# Altium PCB ESP32PCB.PcbDoc
Units mm, origin at the board's own origin, x right, y up, seen from the top; angles counter-clockwise.
Board outline 35.6 x 51 mm, 2 copper layers (Top Layer, Bottom Layer); 8 components, 9 nets, 32 pads, 4 vias.
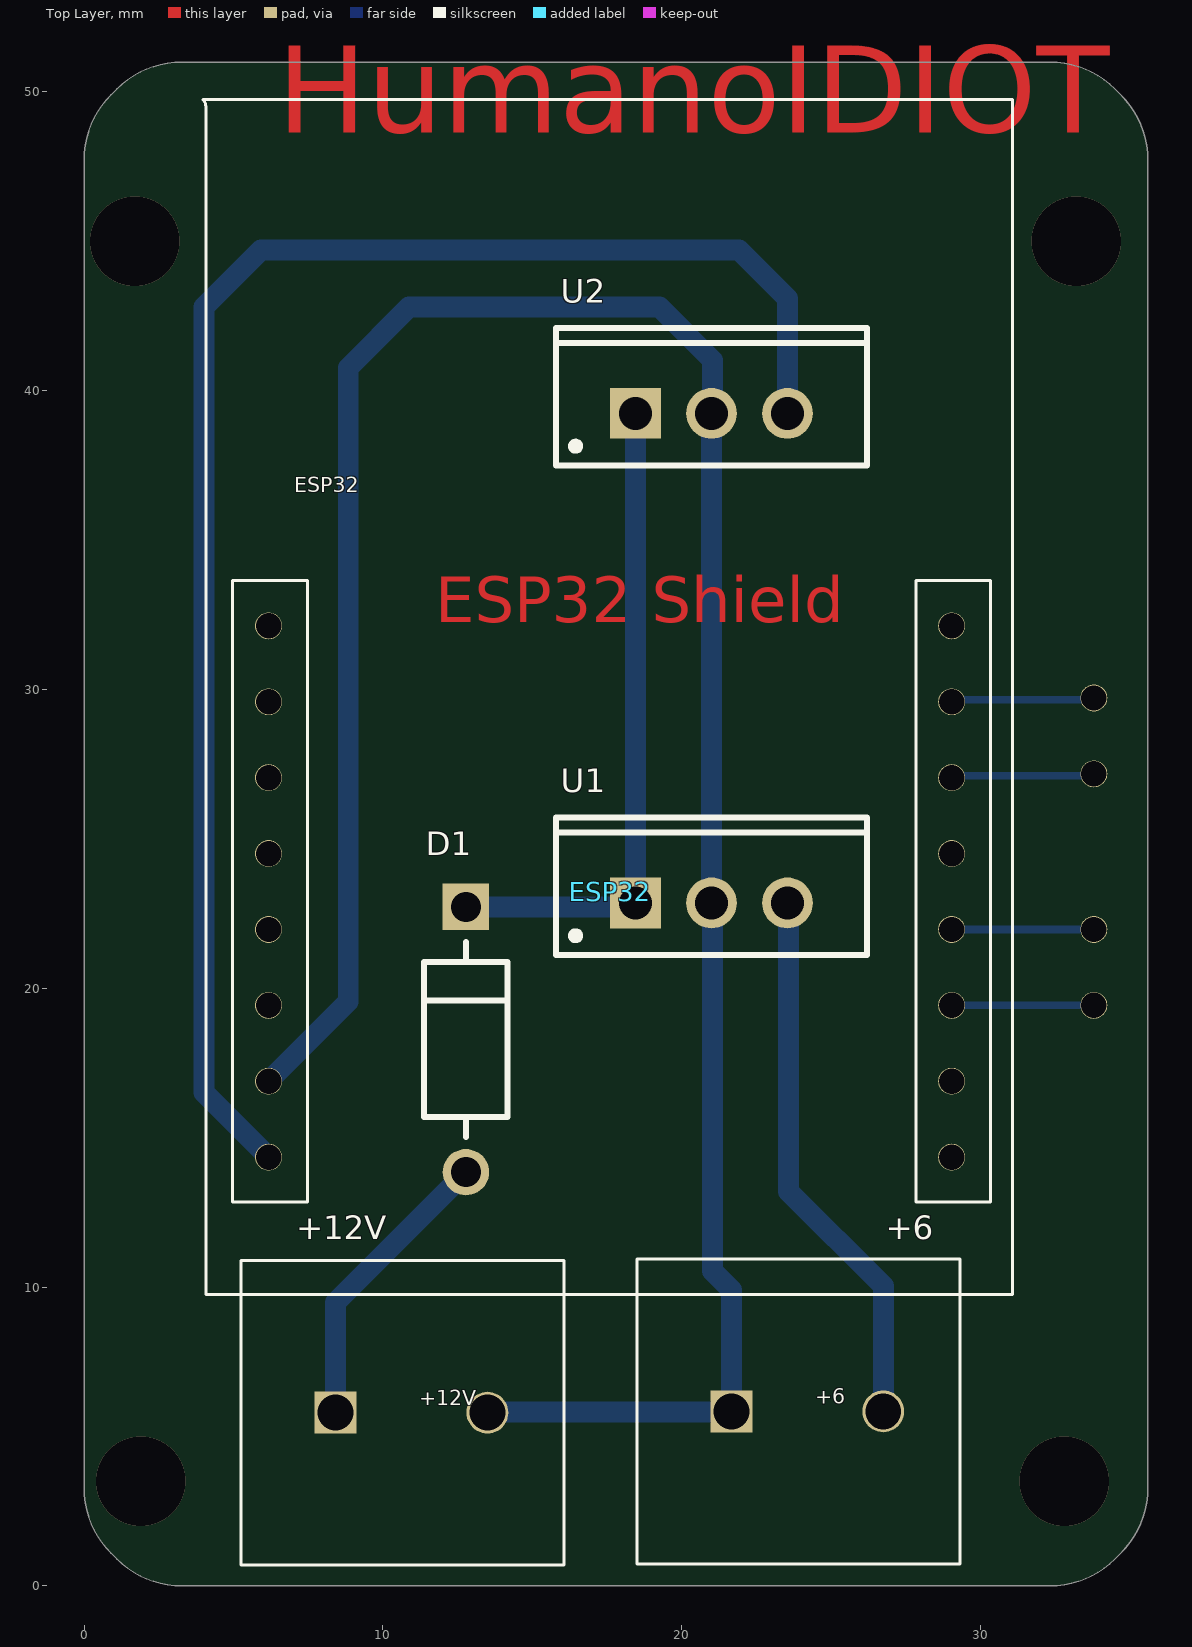
[diagram p0: Top Layer view]
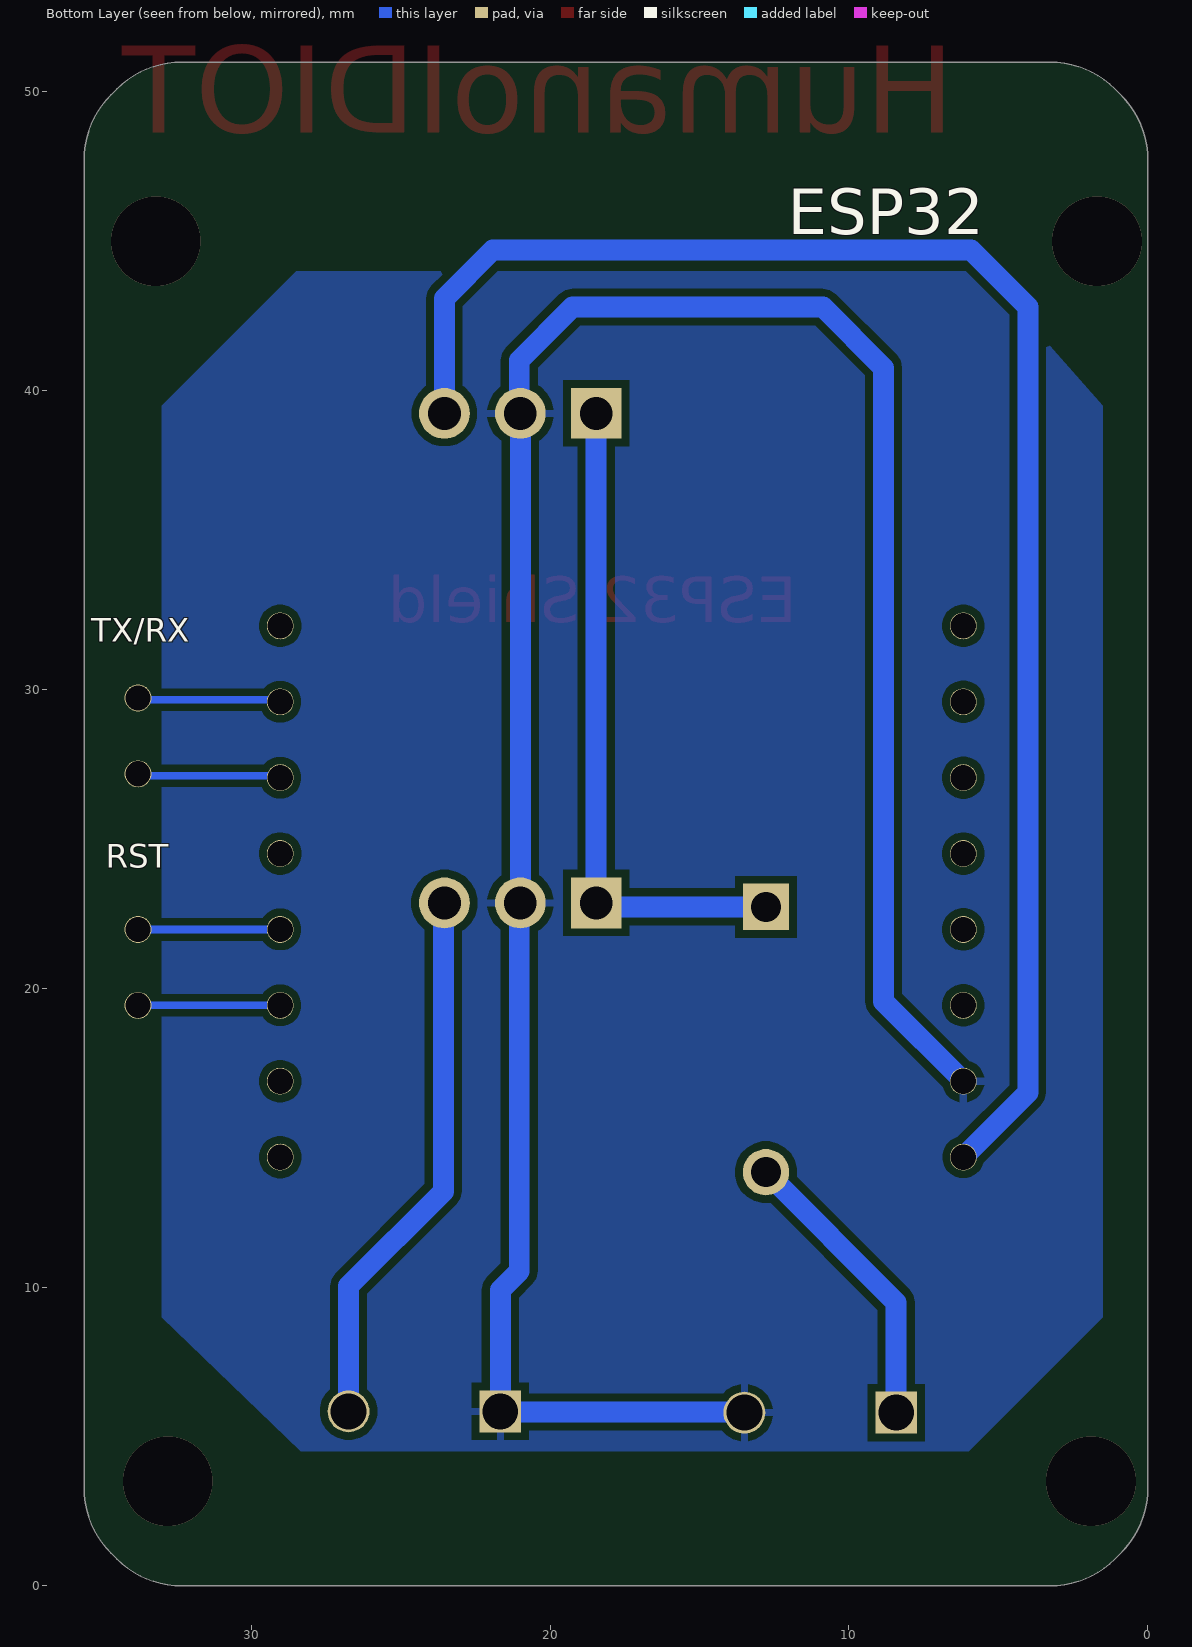
[diagram p1: Bottom Layer view, seen from below]

## Layer stack, top to bottom
Top Solder: solder mask 0.0102, Solder Resist, Dk 3.5
Top Layer: signal copper 0.0356
Dielectric 1: dielectric 0.32, FR-4, Dk 4.8
Bottom Layer: signal copper 0.0356
Bottom Solder: solder mask 0.0102, Solder Resist, Dk 3.5

## Board outline
1.102,0.898 0.898,1.102 cw(c3.066,3.27) 0,3.27 0,47.73 cw(c3.066,47.73) 0.898,49.898 1.102,50.102 cw(c3.27,47.934) 3.27,51 32.33,51 cw(c32.33,47.934) 34.498,50.102 34.702,49.898 cw(c32.534,47.73) 35.6,47.73 35.6,3.27 cw(c32.534,3.27) 34.702,1.102 34.498,0.898 cw(c32.33,3.066) 32.33,0 3.27,0 cw(c3.27,3.066)

## Design rules (kind name [scope] priority, off if disabled: settings)
Clearance [All] p1: gap=0.254 ignorepadtopadclearanceinfootprint=FALSE
HoleSize [All] p1: absolutevalues=TRUE maxlimit=5 minlimit=0.025 maxpercent=80.000 minpercent=20.000
PolygonConnect [All] p1: connectstyle=Relief reliefconductorwidth=0.254 reliefentries=4 polygonreliefangle="90 Angle" airgapwidth=0.254
RoutingVias [All] p1: holewidth=0.711 width=1.27 viastyle="Through Hole" minholewidth=0.711 minwidth=1.27 maxholewidth=0.711 maxwidth=1.27
SolderMaskExpansion [All] p1: expansion=0.102 istentingtop=FALSE
Width [All] p1: maxlimit=0.7 minlimit=0.254 preferedwidth=0.7 bottomlayer_prefwidth=0.3 minimp=50.000000 maximp=50.000000 favimp=50.000000
29 further rules are at their usual default settings.

## Components (designator, comment, footprint, x,y, rotation, side; value= is the part's Value field where it differs from the comment)
+6 "Screw Terminal 2 pins" "Screw Terminal 2 pins" 24.209,5.842 r0 top (schematic designator J1)
+12V "Screw Terminal 2 pins" "Screw Terminal 2 pins" 10.96,5.8 r0 top (schematic designator J2)
D1 "1N4007" FP-1N4007-MFG 12.779,18.288 r270 top value=15pF
ESP32 "ESP PINS" "ESP32 CAM" 6.175,14.351 r0 top locked (schematic designator J3)
RST "RST" "Pin Header 1x2" 33.794,21.971 r0 bottom (schematic designator J5)
TX/RX "TX/RX" "Pin Header 1x2" 33.794,29.718 r0 bottom (schematic designator J4)
U1 "L7806ABV" TO220 21,22.86 r0 top
U2 "L7805CV" TO220 21,39.243 r0 top

## Footprints (in the part's own frame and the unit in brackets; to place one, negate y for a bottom-side part, rotate by r counter-clockwise, add the part's x,y. Pads: shape width x height; smd on the part's side, far side on the other; paste and mask are expansions set on the pad)
"ESP32 CAM" [mm]
  round 0.9 hole 0.85: 0(22.86,5.08) 1(22.86,15.24) 2(0,15.24) 3(22.86,12.7) 3.3/5V(22.86,10.16) 3.3V(22.86,0) 4(0,17.78) 5V(0,0) 12(0,5.08) 13(0,7.62) 14(0,12.7) 15(0,10.16) 16(22.86,2.54) GND(0,2.54) GNDR(22.86,7.62) GRND(22.86,17.78)
  silkscreen extent -2.2,-4.6 24.9,35.4, body extent -2.1,-4.6 24.9,35.4, height 5.36
FP-1N4007-MFG [mm]
  rect 1.55x1.55 hole 1 paste-2539.97 mask+0: 1(-4.44,0)
  round 1.55 hole 1 paste-2539.97 mask+0: 2(4.44,0)
  silkscreen extent -3.26,-1.4 3.26,1.4, body extent -5.32,-1.5 5.32,1.5, height 0.25
"Pin Header 1x2" [mm]
  round 0.9 hole 0.85: 1(0,2.54) 2(0,0)
  body extent -1.3,-1.29 1.24,3.79, height 8.29
"Screw Terminal 2 pins" [mm]
  rect 1.4x1.4 hole 1.2 mask+0.102: 1(-2.54,0)
  round 1.4 hole 1.2 mask+0.102: 2(2.54,0)
  silkscreen extent -5.7,-5.1 5.1,5.1, body extent -5.66,-5.1 5.1,5.1, height 14.1
TO220 [mm] "TO, Thru-Hole, Vertical, Heatsink Mounted; 3 In-Line Leads; Pitch 2.54 mm"
  rect 1.7x1.7 hole 1.1: 1(-2.54,0)
  round 1.7 hole 1.1: 2(0,0) 3(2.54,0)
  silkscreen extent -5.2,-1.75 5.2,2.85, body extent -5.25,-1.8 5.25,2.9, height 19.7

## Part data
+6 +12V: "Brass Alloy 1x2P 16A -40℃~+105℃ 300V Blue Tin 12~24 Direct Insert 5.08mm 1 2 Plugin,P=5.08mm Screw Terminal Blocks ROHS", Manufacturer=CUI, Manufacturer Part Number=TB004-508-02BE, Supplier Part Number=C3818636, Supplier="LSCS ELECTRONICS"
D1: library part CMP-123542-000001-1, "Rectifier diode 1000 V 1 A DO-41, ,", Capacitance=15pF, Forward Current=1A, Manufacturer=Diotec, Max Junction Temp=+175°C, Max Repetitive Reverse Voltage=1000V, Max Surge Forward Current=27A, Peak Reverse Current=5uA, Temperature="-50°C to +175°C", Temperature Range Low=-50°C, Automotive=No, Category=Diode, ComponentLink2Description=Datasheet, ComponentLink2URL=https://datasheet.octopart.com/1N4007-Diotec-datasheet-62346875.pdf, Device Class L1="Discrete Semiconductors", Device Class L2=Diodes, Device Class L3="Rectifier Diodes", Height=2.8mm, Ipc Land Pattern Name=DIOAD888W100L520D280, Lead Free=Yes, Manufacturer Part Number=1N4007, Octopart=https://octopart.com/1n4007-diotec-4040411, Package=1N4007, Reverse Voltage=1000V, RoHS=TRUE, Temperature Range High=+175°C
RST TX/RX: library part "Pin Header 1x2"
U1: library part CMP-0244-00478-1, "Positive Voltage Regulator, 6V, 3-Pin TO-220", ComponentLink1Description="Manufacturer URL", ComponentLink1URL=http://www.st.com, ComponentLink2Description=Datasheet, ComponentLink2URL=http://www.st.com/internet/com/TECHNICAL_RESOURCES/TECHNICAL_LITERATURE/DATASHEET/CD00000444.pdf, ComponentLink3Description="Package Specification", ComponentLink3URL=http://www.st.com/internet/com/TECHNICAL_RESOURCES/TECHNICAL_LITERATURE/PACKAGE_INFORMATION/CD00004649.pdf, DatasheetVersion=16/11/2011, PackageDescription="TO, Thru-Hole, Vertical, Heatsink Mounted; 3 In-Line Leads; Pitch 2.54 mm", PackageReference=TO220, PackageVersion=ver3.0
U2: library part CMP-0244-00483-1, "Positive Voltage Regulator, 5V, 3-Pin TO-220", ComponentLink1Description="Manufacturer URL", ComponentLink1URL=http://www.st.com, ComponentLink2Description=Datasheet, ComponentLink2URL=http://www.st.com/internet/com/TECHNICAL_RESOURCES/TECHNICAL_LITERATURE/DATASHEET/CD00000444.pdf, ComponentLink3Description="Package Specification", ComponentLink3URL=http://www.st.com/internet/com/TECHNICAL_RESOURCES/TECHNICAL_LITERATURE/PACKAGE_INFORMATION/CD00004649.pdf, DatasheetVersion=16/11/2011, PackageDescription="TO, Thru-Hole, Vertical, Heatsink Mounted; 3 In-Line Leads; Pitch 2.54 mm", PackageReference=TO220, PackageVersion=ver3.0

## Via types
v1: diameter 3, hole 3, Top Layer to Bottom Layer, 4 vias

## Nets (pads, with @x,y where several pads share a name; then routed paths per layer and width w, separated by ;. In a path a pad name is that pad's centre, name@x,y a point inside that pad or via, vN(x,y) a via of type N, cw(c..) or ccw(c..) an arc to the next point about the centre after c; other vN are vias at no path point)
+5V: ESP32.5V U2.3 | length 54.2
  Bottom Layer w0.7: ESP32.5V 4.016,16.51 4.016,42.799 5.921,44.704 21.923,44.704 23.54,43.087 U2.3
+6V: +6.2 U1.3 | length 18.3
  Bottom Layer w0.7: U1.3@23.574,22.86 23.574,13.208 26.749,10.033 +6.2
+12V: +12V.1 D1.2 | length 9.9
  Bottom Layer w0.7: +12V.1 8.42,9.489 D1.2
+D: D1.1 U1.1 U2.1 | length 22
  Bottom Layer w0.7: D1.1 U1.1@18.362,22.728 ; U1.1 U2.1
GND: +6.1 +12V.2 ESP32.GND U1.2 U2.2 | length 82.4
  Bottom Layer w0.7: ESP32.GND 8.842,19.558 8.842,40.767 10.874,42.799 19.256,42.799 21.034,41.021 21.034,39.277 U2.2 U1.2 ; +12V.2 13.521,5.821 21.648,5.821 +6.1 21.669,9.906 21.034,10.541 U1.2@21.034,22.86
J5_1: ESP32.GNDR RST.2 | length 4.7
  Bottom Layer w0.255: ESP32.GNDR RST.2@33.734,21.971
RST: ESP32.0 RST.1 | length 4.7
  Bottom Layer w0.255: ESP32.0 RST.1@33.734,19.431
RX: ESP32.3 TX/RX.1 | length 4.8
  Bottom Layer w0.255: ESP32.3@29.099,27.114 TX/RX.1@33.671,27.114
  Bottom Layer w0.381: ESP32.3 ESP32.3@29.099,27.114 ; TX/RX.1@33.671,27.114 TX/RX.1@33.734,27.178
TX: ESP32.1 TX/RX.2 | length 4.8
  Bottom Layer w0.255: ESP32.1@29.099,29.654 TX/RX.2@33.671,29.654
  Bottom Layer w0.381: ESP32.1 ESP32.1@29.099,29.654 ; TX/RX.2@33.671,29.654 TX/RX.2@33.734,29.718
pads on no net: ESP32.2 ESP32.3.3/5V ESP32.3.3V ESP32.4 ESP32.12 ESP32.13 ESP32.14 ESP32.15 ESP32.16 ESP32.GRND
copper on no net:
  other v1: 1.9,3.5 32.8,3.5 1.7,45 33.2,45

## Polygon pours and split planes (outlines as drawn)
GND on Bottom Layer "GND_L02_P000" (solid, pour order 0): 28.5,44 5.5,44 1.5,39.5 1.5,9 6,4.5 28.348,4.5 33,9 33,39.5

## Other copper
Top Layer:
  text "HumanoIDIOT" at 6.465,47.677 h5
  text "ESP32 Shield" at 11.754,32.254 h1.52

## Silkscreen, mask and mechanical layers (free items; w line width, h text height)
Mechanical 29:
  lines w0.1: 0,3.27 ccw(c3.066,3.27) 0.898,1.102 1.102,0.898 ccw(c3.27,3.066) 3.27,0 29.73,0 32.33,0 ccw(c32.33,3.066) 34.498,0.898 34.702,1.102 ccw(c32.534,3.27) 35.6,3.27 35.6,47.73 ccw(c32.534,47.73) 34.702,49.898 34.498,50.102 ccw(c32.33,47.934) 32.33,51 29.73,51 3.27,51 ccw(c3.27,47.934) 1.102,50.102 0.898,49.898 ccw(c3.066,47.73) 0,47.73 0,3.27